# EAGLE board HealthMonitor (EAGLE 9.5.0)
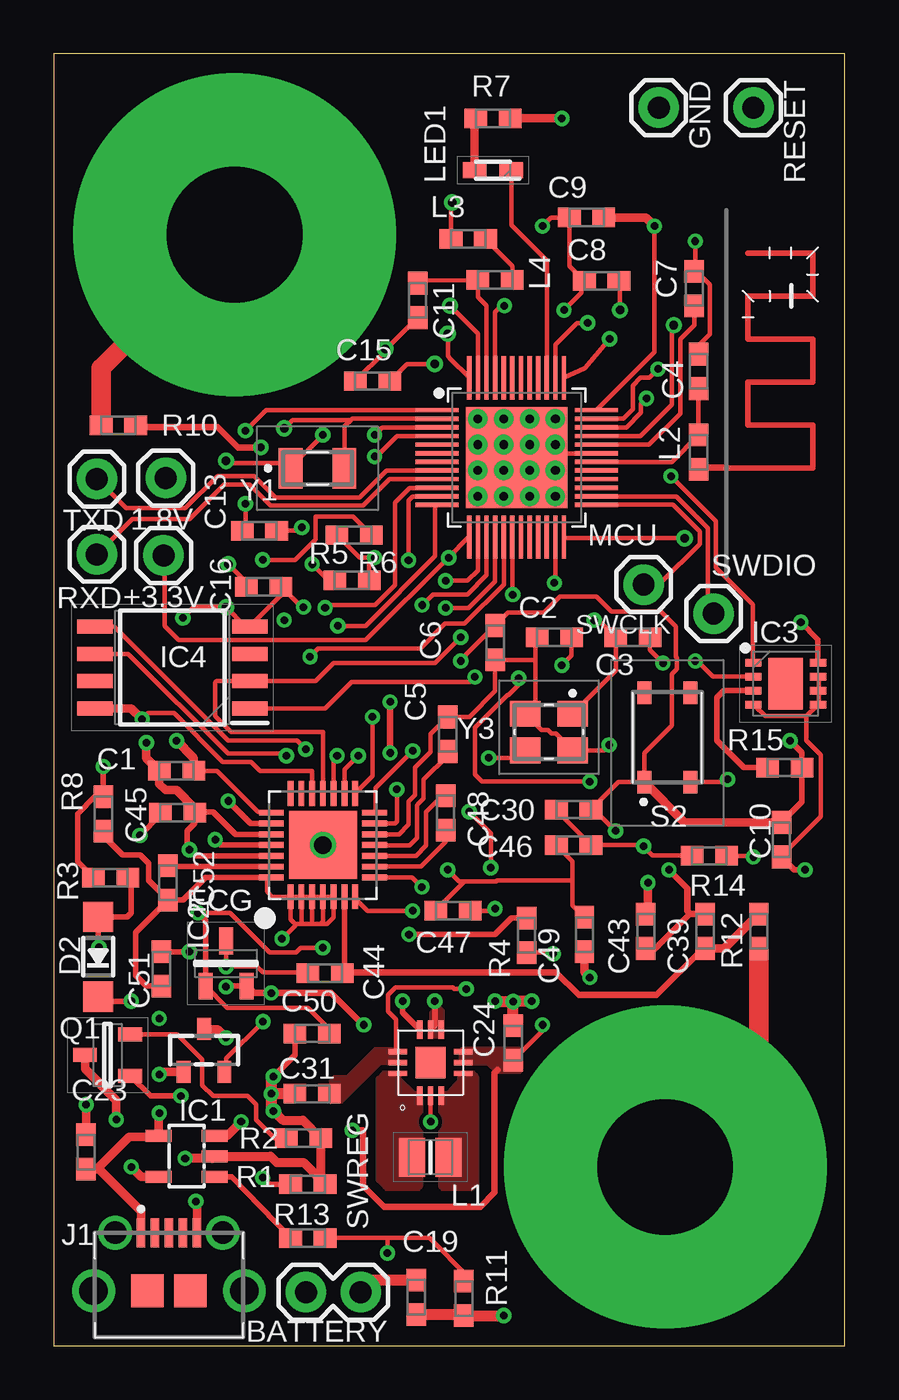
[diagram p0: board, top side]
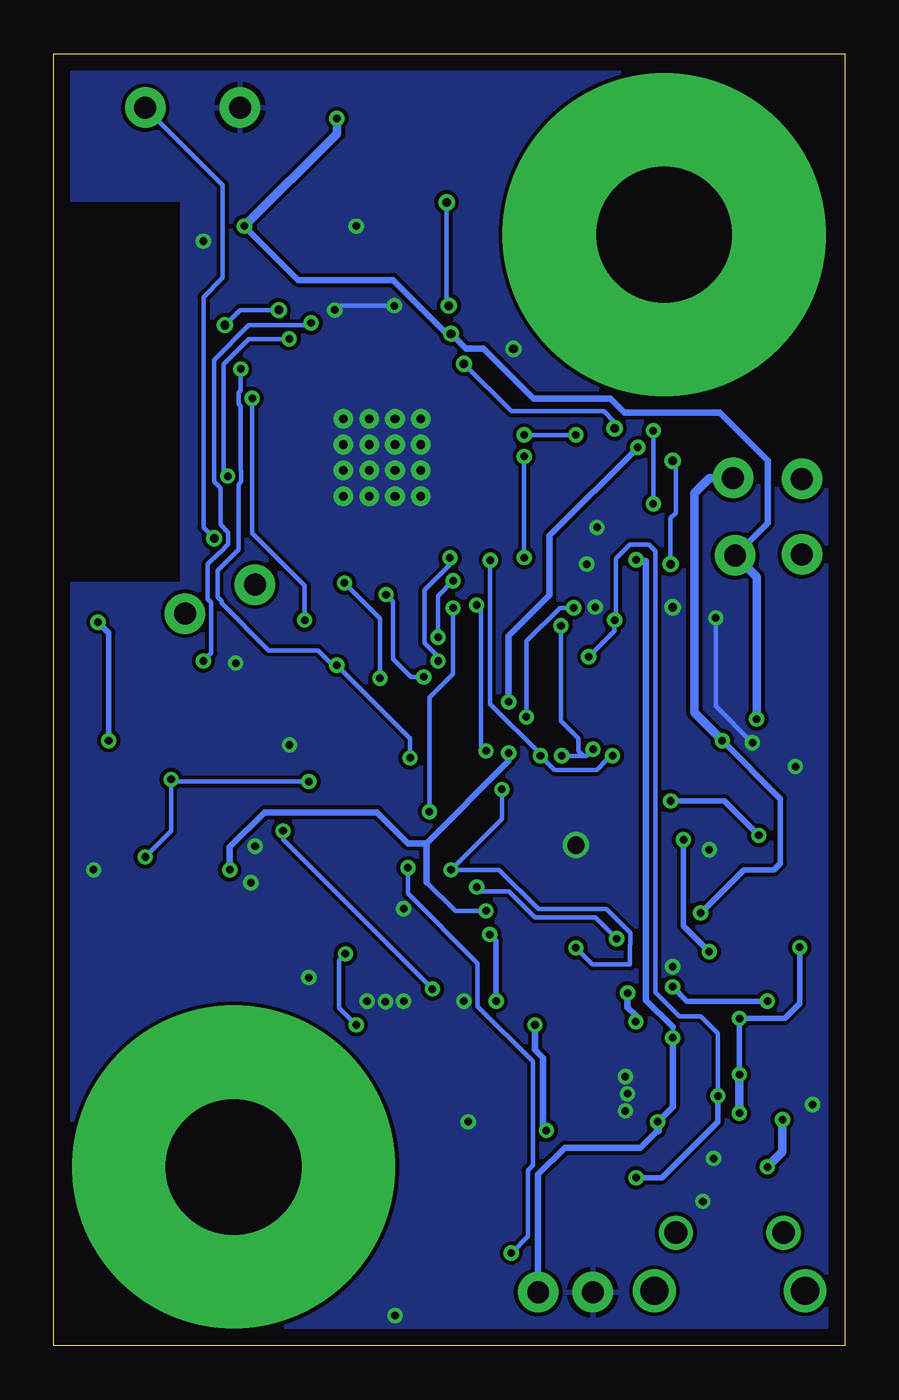
[diagram p1: board, bottom side, seen from below]

Size 36.75 x 60 mm. Coordinates in mm from the lower left corner, seen from the top.
Outline: 0,0 36.75,0 36.75,60 0,60 0,0
Copper layers (1*16): Top 0.035mm / dielectric 1.5mm / Bottom 0.035mm
Design rules "default *": minimum track width 7mil, minimum drill 0.35mm, track to track 7mil, track to pad 7mil, pad to pad 7mil, via to via 7mil, smd to smd 7mil, copper to edge 30mil, drill to drill 7mil, minimum pad ring 10mil, minimum via ring 7mil, stop-mask expansion 4mil, vias tented up to drill 0mil, thermal gap 10mil
Net classes: 1 power: width 0.178 mm
bRestrict: area 30.9,35.5 to 36.7,53.1

## Footprints (pad centres in the part's own frame; a part is rotated, then mirrored left to right if it is on the bottom)
1X01 = drill 1.016 pad 1.88: 1 0,0
1X02 = drill 1.016 pad 1.88: 1 0,0; 2 2.54,0
RESC0603_N = smd 1.05 x 0.9: 1 -0.8,0; 2 0.8,0
SOD-123 = smd 1.4 x 1.4: A 1.85,0; C -1.85,0
QFN-28 = smd 1.15 x 0.27: 1 -2.4,1.5; 2 -2.4,1; 3 -2.4,0.5; 4 -2.4,0; 5 -2.4,-0.5; 6 -2.4,-1; 7 -2.4,-1.5; 15 2.4,-1.5; 16 2.4,-1; 17 2.4,-0.5; 18 2.4,0; 19 2.4,0.5; 20 2.4,1; 21 2.4,1.5 | smd 0.27 x 1.15: 8 -1.5,-2.4; 9 -1,-2.4; 10 -0.5,-2.4; 11 0,-2.4; 12 0.5,-2.4; 13 1,-2.4; 14 1.5,-2.4; 22 1.5,2.4; 23 1,2.4; 24 0.5,2.4; 25 0,2.4; 26 -0.5,2.4; 27 -1,2.4; 28 -1.5,2.4 | smd 3.15 x 3.15: THERMAL 0,0
SOT23-5L = smd 0.55 x 1.2: 1 -0.95,-1.3; 2 0,-1.3; 3 0.95,-1.3; 4 0.95,1.3; 5 -0.95,1.3
SOT95P237X112-3N = smd 1.25 x 0.65: 1 -1.05,0.95; 2 -1.05,-0.95; 3 1.05,0
SON65P300X300X80-9N = smd 0.75 x 0.35: 1 -1.5,0.975; 2 -1.5,0.325; 3 -1.5,-0.325; 4 -1.5,-0.975; 5 1.5,-0.975; 6 1.5,-0.325; 7 1.5,0.325; 8 1.5,0.975 | smd 1.6 x 2.4: 9 0,0
SOIC127P790X216-8N = smd 1.65 x 0.65: 1 -3.6,1.905; 2 -3.6,0.635; 3 -3.6,-0.635; 4 -3.6,-1.905; 5 3.6,-1.905; 6 3.6,-0.635; 7 3.6,0.635; 8 3.6,1.905
101181940011LF = smd 0.4 x 1.35: 1 -1.3,1.825; 2 -0.65,1.825; 3 0,1.825; 4 0.65,1.825; 5 1.3,1.825 | drill 1.055 pad 1.582: 6 -2.5,1.825; 7 2.5,1.825 | drill 1.32 pad 1.98: 8 -3.5,-0.875; 9 3.5,-0.875 | smd 1.5 x 1.55: 10 -1,-0.875; 11 1,-0.875
INDC2016X100N = smd 1.2 x 1.8: 1 -0.85,0; 2 0.85,0
LEDM168X39N = smd 1.1 x 0.75: 1 -0.85,0; 2 0.85,0
QFN40P600X600X90-48_N = smd 2 x 0.2: 1 -3.7,2.2; 2 -3.7,1.8; 3 -3.7,1.4; 4 -3.7,1; 5 -3.7,0.6; 6 -3.7,0.2; 7 -3.7,-0.2; 8 -3.7,-0.6; 9 -3.7,-1; 10 -3.7,-1.4; 11 -3.7,-1.8; 12 -3.7,-2.2; 25 3.7,-2.2; 26 3.7,-1.8; 27 3.7,-1.4; 28 3.7,-1; 29 3.7,-0.6; 30 3.7,-0.2; 31 3.7,0.2; 32 3.7,0.6; 33 3.7,1; 34 3.7,1.4; 35 3.7,1.8; 36 3.7,2.2 | smd 0.2 x 2: 13 -2.2,-3.7; 14 -1.8,-3.7; 15 -1.4,-3.7; 16 -1,-3.7; 17 -0.6,-3.7; 18 -0.2,-3.7; 19 0.2,-3.7; 20 0.6,-3.7; 21 1,-3.7; 22 1.4,-3.7; 23 1.8,-3.7; 24 2.2,-3.7; 37 2.2,3.7; 38 1.8,3.7; 39 1.4,3.7; 40 1,3.7; 41 0.6,3.7; 42 0.2,3.7; 43 -0.2,3.7; 44 -0.6,3.7; 45 -1,3.7; 46 -1.4,3.7; 47 -1.8,3.7; 48 -2.2,3.7 | smd 4.7 x 4.7: PAD 0,0 | drill 0.4: PAD@VIA01 -1.8,1.8; PAD@VIA02 -1.8,0.6; PAD@VIA03 -1.8,-0.6; PAD@VIA04 -1.8,-1.8; PAD@VIA05 -0.6,1.8; PAD@VIA06 -0.6,0.6; PAD@VIA07 -0.6,-0.6; PAD@VIA08 -0.6,-1.8; PAD@VIA09 0.6,1.8; PAD@VIA10 0.6,0.6; PAD@VIA11 0.6,-0.6; PAD@VIA12 0.6,-1.8; PAD@VIA13 1.8,1.8; PAD@VIA14 1.8,0.6; PAD@VIA15 1.8,-0.6; PAD@VIA16 1.8,-1.8
SOT96P240X100-3N = smd 1.1 x 0.65: 1 -1.05,0.96; 2 -1.05,-0.96; 3 1.05,0
SOT23-R = smd 0.635 x 1.016: 1 -0.95,-1; 2 0.95,-1; 3 0,1
PTS810SJG250SMTRLFS = smd 1.05 x 0.65: 1 -2.075,1.075; 2 2.075,1.075; 3 -2.075,-1.075; 4 2.075,-1.075
TQFN-12 = smd 0.854 x 0.25: 1 -0.127,0; 2 -0.127,-0.5; 3 -0.127,-1; 7 2.927,-1; 8 2.927,-0.5; 9 2.927,0 | smd 0.25 x 0.854: 4 0.9,-2.027; 5 1.4,-2.027; 6 1.9,-2.027; 10 1.9,1.027; 11 1.4,1.027; 12 0.9,1.027 | smd 1.45 x 1.45: EPAD 1.4,-0.5
QWMP_MEANDERED_LEFT_+6 = smd 0.254 x 0.254: P$1 0,0
ABS0716632768KHZT = smd 1.1 x 1.9: 1 -1.25,0; 2 1.25,0
ABM8G16000MHZB4YT = smd 1.4 x 1.2: 1 -1.1,-0.85; 2 1.1,-0.85; 3 1.1,0.85; 4 -1.1,0.85

## Placement (x,y rotation side)
1.8V  [1X01]  5.2,40.3 180 top
+3.3V  [1X01]  5.1,36.7 180 top
BATTERY  [1X02]  14.25,2.48 180 top
C1  1uF  [RESC0603_N]  5.7,26.7 0 top
C2  12pF  [RESC0603_N]  23.25,32.9 180 top
C3  12pF  [RESC0603_N]  26.9,32.9 0 top
C4  0.8pF  [RESC0603_N]  29.95,45.25 90 top
C5  1nF  [RESC0603_N]  18.3,28.4 90 top
C6  100nF  [RESC0603_N]  20.5,32.65 270 top
C7  N.M.  [RESC0603_N]  29.75,49.1 90 top
C8  100pF  [RESC0603_N]  25.45,49.45 180 top
C9  100nF  [RESC0603_N]  24.75,52.4 180 top
C10  4.7µF  [RESC0603_N]  33.8,23.5 270 top
C11  1.0µF  [RESC0603_N]  16.9,48.55 270 top
C13  100nF  [RESC0603_N]  9.55,37.85 0 top
C15  12pF  [RESC0603_N]  14.8,44.8 0 top
C16  12pF  [RESC0603_N]  9.75,35.25 180 top
C19  10µF  [RESC0603_N]  16.84,2.25 270 top
C23  4.7µF  [RESC0603_N]  1.5,9 90 top
C24  10µF  [RESC0603_N]  21.34,14.06 90 top
C30  100nF  [RESC0603_N]  24.15,24.9 180 top
C31  22µF  [RESC0603_N]  12,11.7 180 top
C39  1nF  [RESC0603_N]  30.25,19.25 90 top
C43  10pF  [RESC0603_N]  27.5,19.25 90 top
C44  10pF  [RESC0603_N]  12.6,17.3 180 top
C45  10uF  [RESC0603_N]  5.75,24.75 0 top
C46  1uF  [RESC0603_N]  24.15,23.25 0 top
C47  10uF  [RESC0603_N]  18.55,20.2 0 top
C48  1uF  [RESC0603_N]  18.2,24.75 270 top
C49  1uF  [RESC0603_N]  24.65,19.1 270 top
C50  10uF  [RESC0603_N]  12,14.5 180 top
C51  10uF  [RESC0603_N]  5,17.5 270 top
C52  1uF  [RESC0603_N]  5.3,21.5 270 top
D2  MBR120  [SOD-123]  2.06,18.06 90 top
ECG  MAX30003CTI+  [QFN-28]  12.5,23.25 90 top
GND  [1X01]  28.1,57.5 270 top
IC1  MCP73831/OT  [SOT23-5L]  6.17,8.8 90 top
IC2  MCP1811AT-033_TT  [SOT95P237X112-3N]  8,17.75 90 top
IC3  MAX30205MTA+T  [SON65P300X300X80-9N]  34,30.75 0 top
IC4  AT25QF128A-SHB-T  [SOIC127P790X216-8N]  5.5,31.5 180 top
J1  10118194-0011LF  [101181940011LF]  5.35,3.42 0 top
L1  DFE201610R-H-1R0M=P2  [INDC2016X100N]  17.49,8.75 180 top
L2  3.9nH  [RESC0603_N]  29.95,41.5 270 top
L3  10µH  [RESC0603_N]  19.25,51.4 0 top
L4  15nH  [RESC0603_N]  20.5,49.5 180 top
LED1  IN-S63AT5G  [LEDM168X39N]  20.4,54.6 180 top
MCU  NRF52832  [QFN40P600X600X90-48_N]  21.5,41.25 0 top
Q1  2N7002K-7  [SOT96P240X100-3N]  2.5,13.5 180 top
Q3  DMG2305  [SOT23-R]  6.98,13.72 0 top
R1  10k  [RESC0603_N]  11.8,7.5 0 top
R2  10k  [RESC0603_N]  11.6,9.64 0 top
R3  100k  [RESC0603_N]  2.64,21.74 0 top
R4  100k  [RESC0603_N]  21.96,19.06 90 top
R5  100k  [RESC0603_N]  13.85,35.55 0 top
R6  100k  [RESC0603_N]  13.95,37.65 0 top
R7  60R  [RESC0603_N]  20.4,57 0 top
R8  0  [RESC0603_N]  2.3,24.7 270 top
R10  49.9k  [RESC0603_N]  3,42.75 0 top
R11  100k  [RESC0603_N]  19.05,2.2 90 top
R12  49.9K  [RESC0603_N]  32.75,19.25 90 top
R13  100k  [RESC0603_N]  11.8,5 0 top
R14  10k  [RESC0603_N]  30.45,22.75 180 top
R15  4.7k  [RESC0603_N]  33.95,26.85 0 top
RESET  [1X01]  32.5,57.5 270 top
RXD  [1X01]  2,36.75 180 top
S2  PTS810SJK250SMTRLFS  [PTS810SJG250SMTRLFS]  28.5,28.25 90 top
SWCLK  [1X01]  27.4,35.35 180 top
SWDIO  [1X01]  30.65,34 270 top
SWREG  SL9120IRVR  [TQFN-12]  17,11.75 90 top
TXD  [1X01]  2,40.25 180 top
U$5  ANTENNA_QUARTER-WAVE_MONOPOLE_MEANDERED_LEFT  [QWMP_MEANDERED_LEFT_+6]  31.25,40.75 0 top
Y1  ABS07-166-32.768KHZ-T  [ABS0716632768KHZT]  12.25,40.75 0 top
Y3  ABM8G-12.000MHZ-4Y-T3  [ABM8G16000MHZB4YT]  23,28.5 180 top

## Library data of the parts
1.8V +3.3V BATTERY GND RESET RXD SWCLK SWDIO TXD = SparkFun-Connectors
C1-C11 C13 C15 C16 C19 C23 C24 C30 C31 C39 C43-C52 L2-L4 = Nordic_nRF
D2 Q3 = microbuilder
ECG = circuitects
IC1 = adafruit
IC2 = SamacSys_Parts; DESCRIPTION: LDO Voltage Regulators Ultra Low Iq LDO; HEIGHT: 1.12mm; MANUFACTURER_NAME: Microchip; MANUFACTURER_PART_NUMBER: MCP1811AT-033/TT; MOUSER_PART_NUMBER: 579-MCP1811AT-033/TT; MOUSER_PRICE-STOCK: https://www.mouser.com/Search/Refine.aspx?Keyword=579-MCP1811AT-033%2FTT
IC3 = SamacSys_Parts; DESCRIPTION: Human Body Temperature Sensor, 8 TDFN-EP; HEIGHT: 0.8mm; MANUFACTURER_NAME: Maxim Integrated; MANUFACTURER_PART_NUMBER: MAX30205MTA+T; MOUSER_PART_NUMBER: 700-MAX30205MTA+T; MOUSER_PRICE-STOCK: https://www.mouser.com/Search/Refine.aspx?Keyword=700-MAX30205MTA%2BT
IC4 = SamacSys_Parts; DESCRIPTION: NOR Flash 128Mb, 133MHz, QPI,8-SOIC-W, IND TEMP, 2.7-3.6V, T&R; HEIGHT: 2.16mm; MANUFACTURER_NAME: Adesto Technologies; MANUFACTURER_PART_NUMBER: AT25QF128A-SHB-T; MOUSER_PART_NUMBER: 988-AT25QF128A-SHB-T; MOUSER_PRICE-STOCK: https://www.mouser.com/Search/Refine.aspx?Keyword=988-AT25QF128A-SHB-T
J1 = SamacSys_Parts; DESCRIPTION: Power to the Board MICRO USD B-TYPE; HEIGHT: 2mm; MANUFACTURER_NAME: Amphenol; MANUFACTURER_PART_NUMBER: 10118194-0011LF; MOUSER_PART_NUMBER: 649-10118194-0011LF; MOUSER_PRICE-STOCK: https://www.mouser.com/Search/Refine.aspx?Keyword=649-10118194-0011LF
L1 = SamacSys_Parts; DESCRIPTION: DFE201610R Series Inductor 1.0uH +/-20% 0806 (2016); HEIGHT: 1mm; MANUFACTURER_NAME: Murata Electronics; MANUFACTURER_PART_NUMBER: DFE201610R-H-1R0M=P2; MOUSER_PART_NUMBER: 81-DFE201610RH1R0MP2; MOUSER_PRICE-STOCK: https://www.mouser.com/Search/Refine.aspx?Keyword=81-DFE201610RH1R0MP2
LED1 = SamacSys_Parts; DESCRIPTION: Standard LEDs - SMD True Green LED; HEIGHT: 0.39mm; MANUFACTURER_NAME: Inolux; MANUFACTURER_PART_NUMBER: IN-S63AT5G; MOUSER_PART_NUMBER: 743-IN-S63AT5G; MOUSER_PRICE-STOCK: https://www.mouser.com/Search/Refine.aspx?Keyword=743-IN-S63AT5G
MCU = Nordic_nRFMAV
Q1 = SamacSys_Parts; ALLIED_NUMBER: 70437208; ALLIED_PRICE-STOCK: https://www.alliedelec.com/diodes-inc-2n7002k-7/70437208/; DESCRIPTION: N-CHANNEL ENHANCEMENT MODE MOSFET; HEIGHT: 1mm; MANUFACTURER_NAME: Diodes Inc.; MANUFACTURER_PART_NUMBER: 2N7002K-7; MOUSER_PART_NUMBER: 621-2N7002K-7; MOUSER_PRICE-STOCK: https://www.mouser.com/Search/Refine.aspx?Keyword=621-2N7002K-7; RS_PART_NUMBER: 7703383; RS_PRICE-STOCK: https://uk.rs-online.com/web/p/products/7703383
R1-R8 R10-R15 U$5 = Nordic_misc
S2 = SamacSys_Parts; DESCRIPTION: IP40 Black Button Tactile Switch, SPST-NO 50 mA 3mm Surface Mount; HEIGHT: mm; MANUFACTURER_NAME: C & K COMPONENTS; MANUFACTURER_PART_NUMBER: PTS810SJK250SMTRLFS; MOUSER_PART_NUMBER: 611-PTS810SJK250SMTR; MOUSER_PRICE-STOCK: https://www.mouser.com/Search/Refine.aspx?Keyword=611-PTS810SJK250SMTR; RS_PART_NUMBER: 1359396P; RS_PRICE-STOCK: http://uk.rs-online.com/web/p/products/1359396P
SWREG = MasumAhmed
Y1 = SamacSys_Parts; DESCRIPTION: Crystal IOT 32.786KHz XTAL 10ppm; HEIGHT: 0.9mm; MANUFACTURER_NAME: ABRACON; MANUFACTURER_PART_NUMBER: ABS07-166-32.768KHZ-T; MOUSER_PART_NUMBER: 815-ABS0716632.768KT; MOUSER_PRICE-STOCK: https://www.mouser.com/Search/Refine.aspx?Keyword=815-ABS0716632.768KT; RS_PART_NUMBER: 1753474P; RS_PRICE-STOCK: http://uk.rs-online.com/web/p/products/1753474P
Y3 = SamacSys_Parts; ALLIED_NUMBER: 71528098; ALLIED_PRICE-STOCK: https://www.alliedelec.com/abracon-abm8g-12-000mhz-4y-t3/71528098/; DESCRIPTION: Abracon 12MHz Crystal Unit +/-30ppm SMD 4-Pin 3.2 x 2.5 x 1mm; HEIGHT: 1mm; MANUFACTURER_NAME: ABRACON; MANUFACTURER_PART_NUMBER: ABM8G-12.000MHZ-4Y-T3; MOUSER_PART_NUMBER: 815-ABM8G-12-4YT3; MOUSER_PRICE-STOCK: https://www.mouser.com/Search/Refine.aspx?Keyword=815-ABM8G-12-4YT3; RS_PART_NUMBER: 1712832P; RS_PRICE-STOCK: http://uk.rs-online.com/web/p/products/1712832P

## Nets
3.3V [power]: +3.3V.1 C6.1 C9.1 C10.1 C30.1 C31.1 ECG.19 IC3.8 IC4.8 MCU.13 MCU.36 MCU.48 R7.2 R15.2 S2.1 SWREG.10 SWREG.11
+1.8V [power]: 1.8V.1 C1.2 C46.1 C47.1 C49.1 C50.1 ECG.13 ECG.22 IC2.1
AGND: C51.2 C52.2 ECG.1 ECG.2 ECG.3 ECG.4 ECG.5 ECG.8 ECG.28 R8.2
BATT_VOL: MCU.4 R5.2 R6.1
CH_ENABLE: MCU.17 Q1.1 R1.1
CHARGE_STAT: MCU.16 R11.2 R13.2
CSB: ECG.15 MCU.10
ECGN: R10.1
ECGN1: C39.2 C43.1 ECG.7 R10.2
ECGP: R12.1
ECGP1: C39.1 C44.1 ECG.6 R12.2
FCLK: ECG.14 MCU.15
GND [power]: BATTERY.2 C1.1 C2.2 C3.2 C4.2 C5.2 C6.2 C7.2 C8.2 C9.2 C10.2 C11.2 C13.2 C15.1 C16.1 C19.2 C23.2 C24.2 C30.2 C31.2 C43.2 C44.2 C45.2 C46.2 C47.2 C49.2 C50.2 ECG.12 ECG.24 ECG.26 ECG.THERMAL GND.1 IC1.2 IC2.3 IC3.4 IC3.5 IC3.6 IC3.7 IC4.4 J1.5 MCU.31 MCU.45 MCU.PAD MCU.PAD@VIA01 MCU.PAD@VIA02 MCU.PAD@VIA03 MCU.PAD@VIA04 MCU.PAD@VIA05 MCU.PAD@VIA06 MCU.PAD@VIA07 MCU.PAD@VIA08 MCU.PAD@VIA09 MCU.PAD@VIA10 MCU.PAD@VIA11 MCU.PAD@VIA12 MCU.PAD@VIA13 MCU.PAD@VIA14 MCU.PAD@VIA15 MCU.PAD@VIA16 R1.2 R2.2 R3.1 R5.1 R8.1 R11.1 R14.2 SWREG.2 SWREG.7 SWREG.8 Y3.2 Y3.4
LEDA: LED1.1 MCU.39
LX1 [power]: L1.1 SWREG.3 SWREG.4
LX2: L1.2 SWREG.1 SWREG.12
MISO: ECG.18 IC4.2 MCU.14
MOSI: ECG.17 IC4.5 MCU.12
N$1: R4.2 SWREG.9
N$2: IC1.1 R13.1
N$3: Q1.2 R2.1
N$4: C13.1 MCU.1
N$5: LED1.2 R7.1
N$7: IC1.5 Q1.3
N$9: C51.1 ECG.25
N$11: L3.2 L4.1
N$12: L3.1 MCU.47
N$13: C16.2 MCU.3 Y1.1
N$14: C3.1 MCU.34 Y3.1
N$15: C4.1 L2.1 MCU.30
N$16: L2.2 U$5.P$1
N$17: C5.1 ECG.11
N$18: C48.1 ECG.10
N$19: C45.1 ECG.23
N$20: C52.1 ECG.27
N$21: IC3.3 R15.1
N$22: C7.1 MCU.32
N$23: C48.2 ECG.9
N$24: C11.1 L4.2 MCU.46
N$25: C2.1 MCU.35 Y3.3
N$29: C8.1 MCU.33
RESET: MCU.24 RESET.1
RXD: MCU.9 RXD.1
SCL: IC3.2 MCU.38
SCLK: ECG.16 IC4.6 MCU.11
SDA: IC3.1 MCU.37
SF_CS: IC4.1 MCU.18
SWCLK: MCU.25 SWCLK.1
SWDIO: MCU.26 SWDIO.1
SWITCHA: MCU.23 R14.1 S2.3
TXD: MCU.8 TXD.1
V_BATT [power]: BATTERY.1 C19.1 IC1.3 Q3.3 R6.2
VBUS [power]: C23.1 D2.A IC1.4 J1.1 Q3.1 R3.2
VINBAT [power]: C24.1 D2.C IC2.2 Q3.2 R4.1 SWREG.5 SWREG.6
XL1: C15.2 MCU.2 Y1.2

## Tracks (layer width: path | path; a pad name or v marks a point on that pad's centre or on a via)
3.3V  (via drill 0.35, 0.35 pad 0.4, 0.4)
  Top 0.203: v27.9,52 27.9,46.15 MCU.36 | MCU.48 18.38,45.87 18.38,45.88 18.3,45.97 v18.3,47 | ECG.19 12,26.7 9.57,26.7 9.16,27.12 7.84,27.12 5.58,29.38 4.38,29.38 v4.1,29.1 | 12.86,11.34 C31.1 | 18.35,36.64 14.48,32.77 5.79,32.77 5.14,33.41 5.14,36.67 +3.3V.1 | 18.35,36.64 19.24,37.53 MCU.13 | v26.1,23.91 25.05,24.96 C30.1 26.23,26.18 S2.1 27.43,27.52 28.7,28.8 28.7,31.21 28.93,31.44 28.93,31.96 28.9,31.99 28.9,33.4 28.2,34.1 25.9,34.1 25.2,34.8 23.52,34.8 22.77,34.05 21.1,34.05 C6.1 18.9,31.85 v18.9,31.8 | SWREG.10 15.91,13.72 15.91,15.14 15.53,15.53 15.53,16.29 15.87,16.63 18.54,16.63 18.6,16.57 v19.16,16.57 | v18.35,36.59 18.35,36.64
  Top 0.254: C31.1 13,11.7 | v34.2,28.1 34.75,27.55 R15.2 34.75,25.25 C10.1 | v34.7,33.6 35.5,32.8 IC3.8
  Top 0.4: C10.1 29.3,24.3 S2.1 | v4.1,29.1 3.6,29.59 IC4.8 | v27.9,52 27.5,52.4 C9.1 | v23.6,57 R7.2
  Bottom 0.203: v26.1,23.91 26.1,23.51 v19.16,16.57 | v18.35,36.59 18.35,36.27 19.53,35.09 19.53,32.64 18.9,32.01 v18.9,31.8
  Bottom 0.254: v34.2,28.1 34.2,33.1 v34.7,33.6
  Bottom 0.305: v27.9,52 25.4,49.5 21,49.5 18.5,47 v18.3,47 17.61,46.31 16.79,46.31 14.46,43.99 10.89,43.99 10.24,43.34 5.81,43.34 3.59,41.11 3.59,38.21 +3.3V.1
  Bottom 0.4: v4.1,29.1 4.1,35.7 +3.3V.1 | v27.9,52 23.6,56.3 v23.6,57
  pour Top (no thermals): 16,13.1 16,13.8 14.9,13.8 13.6,12.5 13,12.5 12.8,12.3 12.8,11.3 13.4,11.3 15.2,13.1
+1.8V  (via drill 0.35)
  Top 0.203: IC2.1 8.05,15.7 11.8,15.7 12.8,14.7 C50.1 | C1.2 7.59,26.7 9.49,24.8 9.55,24.8 9.6,24.75 ECG.22 | C46.1 24.1,22.5 24.1,21.6 | C49.1 24.1,20.45 24.1,21.6 | C47.1 17.75,20.25 19.07,21.57 | 24.1,21.6 20.59,21.6 20.56,21.57 19.07,21.57 | 19.07,21.57 18.83,21.57 v18.3,22.1 | v12.5,18.48 11.47,18.48 11.26,18.27 10.03,18.27 8.2,20.1 v6.7,20.1 | v15.94,25.84 15.94,24.34 15.85,24.25 ECG.13
  Top 0.254: IC2.1 7.05,19.75 v6.7,20.1
  Top 0.4: v5.7,28.1 6.5,27.3 C1.2
  Bottom 0.203: v12.5,18.48 11.72,17.7 10,17.7 10,18.61 9.97,18.64 9.97,19.16 11.09,20.28 14.24,20.28 16.06,22.1 v18.3,22.1 15.94,24.46 v15.94,25.84
  Bottom 0.254: v6.7,20.1 4.7,22.1 3.3,22.1 3,22.4 3,25.4 v5.7,28.1
  Bottom 0.4: 1.8V.1 6.3,40.3 7,39.6 7,29.4 v5.7,28.1
AGND  (via drill 0.35)
  Top 0.203: ECG.2 ECG.3 | ECG.3 ECG.4 | ECG.4 ECG.5 13,19.9 12.7,19.6 12.4,19.6 | ECG.2 ECG.1 | ECG.1 10.15,20.85 9.9,21.1 9.9,21.75 | ECG.1 11,19.8 11.2,19.6 | 11.2,19.6 11.5,19.6 | 11.5,19.6 12,19.6 | 12,19.6 12.4,19.6 | ECG.4 12.5,19.7 12.4,19.6 | ECG.3 12,19.6 | ECG.2 11.5,19.6 | 11.2,19.6 11.2,19.5 v10.6,18.9 | v17.1,21.3 16.65,21.75 ECG.8
  Top 0.254: ECG.28 9.9,21.75 7.05,21.75 6,20.7 C52.2 | C51.2 4.3,16.7 3.8,17.2 3.8,19.2 C52.2 | C52.2 4.4,21.6 4.4,22.4 4,22.8 3.2,22.8 2.3,23.7 R8.2
  Bottom 0.203: v17.1,21.3 16.9,21.1 15.6,21.1 14.4,19.9 11.6,19.9 v10.6,18.9
BATT_VOL  (via drill 0.35)
  Top 0.203: MCU.4 15.95,42.25 15,41.3 v14.9,41.3 | R6.1 14.2,36.6 v14.9,36.6 14.65,36.35 R5.2
  Bottom 0.203: v14.9,41.3 v14.9,36.6
CH_ENABLE  (via drill 0.35)
  Top 0.203: MCU.17 20.9,35.36 19.07,33.53 18.18,33.53 17.04,32.38 12.29,32.38 v11.9,32
  Top 0.254: R1.1 10,7.5 v9.7,7.8 | v5.9,11.6 4.49,11.6 Q1.1
  Bottom 0.203: v5.9,11.6 5.9,14.5 6.7,15.3 7.7,15.3 8.8,16.4 8.8,36.9 9.1,37.2 10,37.2 10.63,36.57 10.63,33.77 v10.7,33.7 10.7,33.2 v11.9,32
  Bottom 0.254: v5.9,11.6 5.9,10.4 8.5,7.8 v9.7,7.8
CHARGE_STAT  (via drill 0.35)
  Top 0.203: R13.2 15.5,5 | 15.5,5 17.45,5 19.25,3.2 R11.2 | v19.3,24.8 20.3,23.8 v20.3,22.2 | v15.5,4.3 15.5,5 | MCU.16 20.5,35.5 19.26,34.26 v18.2,34.26
  Bottom 0.203: v19.3,24.8 19.3,30.1 18.2,31.2 v18.2,34.26 | v20.3,22.2 20.3,20.99 17.07,17.76 17.07,15.77 14.5,13.2 14.5,8.38 14.73,8.15 14.73,5.07 v15.5,4.3
CSB  (via drill 0.35)
  Top 0.203: ECG.15 14.8,26.45 v14.8,29.2 | v12.6,34.27 12.73,34.4 14.91,34.4 15.85,35.34 15.85,39.15 16.53,39.83 17.75,39.83 17.8,39.84 MCU.10
  Bottom 0.203: v12.6,34.27 13.25,34.27 14.8,32.72 v14.8,29.2
ECGN  (via drill 6.3 pad 15)
  Top 0.9: R10.1 2.2,45.4 v8.4,51.6
ECGN1  (via drill 0.35)
  Top 0.203: v16.67,20.19 14.57,20.19 14,20.77 ECG.7 | 3.81,42.67 R10.2
  Top 0.305: C43.1 27.95,18.45 29.55,20.05 | 29.55,20.05 C39.2 | 3.81,42.67 7.62,42.67 8.57,41.72 v9.62,41.72 | v15.62,27.53 v15.62,29.9 | v28.57,22.1 29.43,21.24 29.43,20.19 29.55,20.05
  Bottom 0.203: 19.43,21.53 18.1,20.19 v16.67,20.19
  Bottom 0.305: v9.62,41.72 13.72,37.62 13.72,34.86 15.62,32.96 v15.62,29.9 | v15.62,27.53 15.62,27.15 19.43,23.34 | 19.43,21.53 19.43,23.34 | v28.57,22.1 28.57,23.16 26.96,24.77 21.73,24.77 20.29,23.34 19.43,23.34
ECGP  (via drill 6.3 pad 15)
  Top 0.9: R12.1 32.75,13.65 28.4,9.3 v28.4,8.3
ECGP1
  Top 0.203: ECG.6 | 13.51,17.42 C44.1 13.53,17.34 | 30.1,18.38 C39.1
  Top 0.254: ECG.6 13.51,17.42
  Top 0.305: 13.53,17.34 23.34,17.34 24.38,16.29 28,16.29 30.1,18.38
  Top 0.4: C39.1 31.15,18.45 R12.2
FCLK  (via drill 0.35)
  Top 0.203: ECG.14 14.95,24.77 14.95,25.91 v16.67,27.63 | MCU.15 20.1,37.53 20.1,35.78 19.21,34.89 17.6,34.89 v17.11,34.4
  Bottom 0.203: v16.67,27.63 16.91,27.86 16.91,34.2 v17.11,34.4
GND  (via drill 0.35, 0.35 pad 0.4, 0.4, 0.8 pad 1)
  Top 0.203: v22.7,52 23.1,52.4 C9.2 23.95,50.15 C8.2 24.5,49.3 24.5,48.9 v23.7,48.1 | C7.2 29.8,49.95 | 29.8,49.95 v29.8,51.3 | v25.8,27.9 25.55,27.65 Y3.4 23.32,28.43 23.12,28.43 22.95,28.6 22.65,28.6 Y3.2 21.91,29.43 22.38,29.91 22.38,31.9 | v28.3,31.7 27.7,32.3 C3.2 | SWREG.2 v17.5,10.4 | IC2.3 v8,17.6 8.1,17.62 9.43,17.62 9.72,17.34 11.72,17.34 C44.2 | C15.1 15.4,46.2 v15.4,46.3 15.45,46.3 C11.2 | C30.2 23.35,24.85 C46.2 27.35,23.25 v27.4,23.2 27.43,23.15 27.81,22.77 29.62,22.77 R14.2 | IC3.7 35.53,31.05 35.53,30.48 IC3.6 35.53,30.39 35.53,29.81 IC3.5 35.43,29.72 34.96,29.24 | 34.96,29.24 33.05,29.24 32.58,29.72 IC3.4 | 22.38,31.9 22.38,32.86 C2.2 | MCU.31 25.15,41.43 23.72,41.43 23.34,41.81 MCU.PAD@VIA14 | 34.96,29.24 34.96,28.1 35.62,27.43 35.62,24.57 33.91,22.86 C10.2 | MCU.PAD 21.43,41.34 20.95,41.81 MCU.PAD@VIA06 | 22.38,31.9 22.33,31.85 C6.2 20.5,30.4 19.3,29.2 C5.2 17.5,28.41 17.5,27.57 16.79,26.85 16.79,25.57 16.49,25.27 16.49,24.2 16.04,23.75 ECG.12 | v11.6,34.3 11.5,34.3 C16.1 10.55,34.85 IC4.4 8.89,33.41 v8,34.3 6.5,34.3 v6,33.8 | R5.1 12.75,35.55 v12,36.3 | v11.52,38 11.37,37.85 C13.2 | MCU.45 20.5,48 20.8,48.3 v20.93,48.3 | IC1.2 7.37,8.7 | C4.2 29.95,46.45 30.48,46.98 30.48,49.27 29.8,49.95 | v20.5,20.3 20.4,20.2 C47.2
  Top 0.254: SWREG.8 17.7,14.88 v17.7,16 | C50.2 11.2,13.5 v10.2,12.5 | ECG.26 6.58,22.75 v6.3,23.03 6.2,23.13 6.2,23.9 6.55,24.25 C45.2 6.6,24.8 7.4,24.8 8.45,23.75 ECG.24 | v2.3,26.9 R8.1 1.9,25.5 1.1,24.7 1.1,22.48 R3.1 | C10.2 34.4,22.1 v34.9,22.1
  Top 0.4: C23.2 v1.5,11.2 | J1.5 6.65,6.65 v6.6,6.7 | v4.3,28 4.3,27.3 C1.1 4.9,26.1 5.2,25.8 5.7,25.8 6.55,24.95 C45.2 | C43.2 27.6,20.15 v27.6,21.5 | C49.2 24.65,17.35 v24.9,17.1
  Top 0.406: 7.37,8.7 v6.1,8.7 | IC1.2 10.07,8.8 10.36,8.51 11.59,8.51 R1.2 12.4,7.7 R2.2 11.57,10.47 10.63,10.47 v10.2,10.9
  Top 0.5: C31.2 v10.1,11.7 | v10.1,11.7 10.1,11 v10.2,10.9 | C24.2 v21.34,15.97 | v21.34,15.97 21.37,16 v22.2,16 | v21.34,15.97 20.52,15.97 v20.5,16 | v10.2,12.5 10.1,12.4 v10.1,11.7 | C19.2 19,1.45 R11.1 v20.9,1.4
  Bottom 0.203: v4.3,28 6,29.7 v6,33.8 | v20.93,48.3 23.5,48.3 v23.7,48.1
  other vias: 12.5,23.25
  pour Bottom: 0,60 0,0 36.75,0 36.75,60
  pour Top (no thermals): 17.5,15.5 17.85,15.85 18.1,15.6 18.1,14.3 17.5,14.3
LEDA
  Top 0.203: MCU.39 22.9,50.4 21.25,52.05 LED1.1
LX1
  pour Top (no thermals): 18.95,12.65 19.45,12.65 19.6,12.5 19.6,7.5 19.4,7.3 18.1,7.3 18,7.4 18,11.7 18.3,11.7 18.6,12 18.9,12.3 18.9,12.6 18.95,12.65
LX2
  pour Top (no thermals): 17,11.7 17,7.4 16.9,7.3 15.5,7.3 15.4,7.4 15.1,7.7 15.1,12.3 15.1,12.4 15.35,12.65 15.98,12.65 16,12.63 16,12.4 16.7,11.7
MISO  (via drill 0.35)
  Top 0.203: ECG.18 12.5,28.5 8.24,28.5 7.5,29.24 7.5,30.8 7.57,30.86 IC4.2 12.16,30.86 13,31.7 17.7,31.7 v18.9,32.9 | MCU.14 19.7,36 19.23,35.53 v18.2,35.53
  Bottom 0.203: v18.9,32.9 18.9,34.83 v18.2,35.53
MOSI  (via drill 0.35)
  Top 0.203: ECG.17 13,27.24 v13.16,27.4 | v11.7,27.7 11.3,28.1 8.1,28.1 2.79,33.41 IC4.5 | v13.19,33.43 14.48,33.43 17.72,36.67 17.72,38.96 MCU.12
  Bottom 0.203: v13.16,27.4 12.19,27.4 | 12.19,27.4 12,27.4 v11.7,27.7 | v13.19,33.43 13.19,29 12.38,28.19 12.38,27.62 12.19,27.43 12.19,27.4
N$1  (via drill 0.35)
  Top 0.254: SWREG.9 16.2,15.48 v16.2,16 | R4.2 21.26,19.86 20.5,19.1 v16.5,19.1
  Bottom 0.254: v16.2,16 16.2,18.8 v16.5,19.1
N$2
  Top 0.254: IC1.1 8.25,7.85 R13.1
N$3
  Top 0.203: R2.1 10.26,9.64 9.4,10.5 9.4,11.2 9,11.6 7.4,11.6 6.9,12.1 6.9,13.3 5.74,14.46 Q1.2
N$4  (via drill 0.35)
  Top 0.203: MCU.1 9.85,43.45 v8.9,42.5 | v8.9,39.1 8.9,38 C13.1
  Bottom 0.203: v8.9,42.5 v8.9,39.1
N$5
  Top 0.4: LED1.2 19.55,56.95 R7.1
N$7  (via drill 0.35)
  Top 0.4: IC1.5 4.05,7.85 v3.6,8.3 | v2.9,10.5 2.9,11.4 1.45,12.85 Q1.3
  Bottom 0.4: v3.6,8.3 2.9,9 v2.9,10.5
N$9  (via drill 0.35)
  Top 0.254: ECG.25 7.75,23.25 v7.5,23.5 | v6.3,18.3 C51.1
  Bottom 0.254: v7.5,23.5 7.5,19.5 v6.3,18.3
N$11
  Top 0.203: L4.1 21.3,50.15 L3.2
N$12  (via drill 0.4)
  Top 0.203: L3.1 18.45,53.05 v18.5,53.1 | v18.4,48.3 19.7,47 MCU.47
  Bottom 0.203: v18.5,53.1 18.5,48.4 v18.4,48.3
N$13  (via drill 0.35, 0.4)
  Top 0.203: MCU.3 15.25,42.65 v14.9,42.3 | v12.5,42.3 11,40.8 | 11,40.8 Y1.1 | C16.2 8.95,35.45 v8.1,36.3 | v8,41.1 8.1,41 10.8,41 11,40.8
  Bottom 0.203: v14.9,42.3 v12.5,42.3 | v8.1,36.3 8.1,38.43 7.86,38.67 7.86,40.96 v8,41.1
N$14  (via drill 0.35)
  Top 0.203: Y3.1 26.1,31.35 C3.1 25.3,33.7 v25.1,33.7 | v27.53,44 27.28,43.75 27.28,43.34 26.59,42.65 MCU.34
  Bottom 0.203: v27.53,44 27.53,37.73 25.1,35.3 v25.1,33.7
N$15
  Top 0.203: MCU.30 28.7,41.05 L2.1 C4.1
N$16
  Top 0.203: U$5.P$1 31.22,40.78 | L2.2 30.03,40.78
  Top 0.305: 31.22,40.78 30.03,40.78
N$17
  Top 0.203: ECG.11 14.95,23.24 16.53,23.24 16.87,23.58 16.87,25.1 16.92,25.15 16.92,25.16 17.17,25.41 17.17,26.29 18.3,27.42 C5.1
N$18
  Top 0.203: ECG.10 16.82,22.75 17.3,23.23 17.3,24.8 18,25.5 18,25.55 C48.1
N$19  (via drill 0.35)
  Top 0.254: ECG.23 9.15,24.25 v8.1,25.3 | C45.1 4.95,24.65 v4,23.7
  Bottom 0.254: v8.1,25.3 5.6,25.3 v4,23.7
N$20
  Top 0.254: ECG.27 5.35,22.25 C52.1
N$21
  Top 0.254: R15.1 32.05,26.85 30.8,28.1 30.8,30.1 31.12,30.43 IC3.3
N$22
  Top 0.203: C7.1 29.75,47.4 29.1,46.75 29.1,43.3 27.65,41.85 MCU.32
N$23
  Top 0.203: ECG.9 17.05,22.25 18.2,23.39 C48.2
N$24
  Top 0.178: C11.1 17.05,49.5 L4.2
  Top 0.203: L4.2 19.7,48.7 20.1,48.3 MCU.46
N$25  (via drill 0.35)
  Top 0.203: C2.1 24.05,32.05 v23.6,31.6 | v20.2,27.3 21.55,27.3 Y3.3 | MCU.35 26.45,43.05 26.9,43.5 26.9,44.6 27.26,44.96 27.66,44.96 v28.07,45.36
  Bottom 0.203: v20.2,27.3 20.2,28.2 v23.6,31.6 23.62,31.62 23.81,31.62 24.48,32.29 26.77,32.29 28.96,34.48 28.96,34.58 29.15,34.77 29.15,36.01 28.16,36.99 28.16,40 28.04,40.12 28.04,40.65 28.07,40.67 28.07,43.64 28.16,43.74 28.16,44.26 28.07,44.36 v28.07,45.36
N$29  (via drill 0.4)
  Top 0.203: C8.1 26.3,49.4 v26.3,48.1 | v28.8,47.4 28.7,47.3 28.7,43.7 27.25,42.25 MCU.33
  Bottom 0.203: v26.3,48.1 28.1,48.1 v28.8,47.4
RESET  (via drill 0.4)
  Top 0.203: v29.3,37.5 23.75,37.5 MCU.24
  Bottom 0.203: RESET.1 28.9,53.9 28.9,49.6 29.8,48.7 29.8,38 v29.3,37.5
RXD
  Top 0.203: MCU.9 15.59,40.25 14.36,39.02 10.08,39.02 9.1,40 7.9,40 6.3,38.4 3.65,38.4 RXD.1
SCL  (via drill 0.35)
  Top 0.203: IC3.2 30.62,31.07 29.9,31.8 v29.8,31.8 | v24.8,47.5 24.3,47.5 23.3,46.5 23.3,44.97 MCU.38
  Bottom 0.203: v29.8,31.8 29.43,32.17 29.43,34.51 29.6,34.67 29.6,36.3 29.06,36.84 29.03,36.84 28.64,37.23 28.64,37.77 29,38.13 29,39.82 29.3,40.12 29.3,45.78 27.69,47.39 24.91,47.39 v24.8,47.5
SCLK  (via drill 0.35)
  Top 0.203: ECG.16 13.5,26.76 v14.14,27.4 | v10.8,27.4 10.7,27.5 8.1,27.5 3.46,32.13 IC4.6 | v16.48,36.48 16.48,39.24 16.67,39.43 17.72,39.43 MCU.11
  Bottom 0.203: v10.8,27.4 11,27.2 11.07,27.2 11.53,26.74 13.49,26.74 v14.14,27.4 14.1,27.43 16.48,29.81 v16.48,36.48
SDA  (via drill 0.35)
  Top 0.203: v25.82,46.76 24.67,45.4 MCU.37 | IC3.1 32.48,31.81 32.48,34.42 30.77,36.13 30.77,38.29 v28.67,40.39
  Bottom 0.203: v28.67,40.39 28.87,40.59 28.87,45.6 27.71,46.76 v25.82,46.76
SF_CS  (via drill 0.35)
  Top 0.203: MCU.18 21.32,37.53 v21.32,34.88 | v19.56,31.06 19.33,30.83 13.83,30.83 12.6,29.59 IC4.1
  Bottom 0.203: v21.32,34.88 21,34.57 21,31.9 20.16,31.06 v19.56,31.06
SWCLK
  Top 0.203: MCU.25 28.76,39.06 30,37.81 30,37.24 28.19,35.43 27.43,35.43 SWCLK.1
SWDIO
  Top 0.203: MCU.26 25.21,39.44 28.92,39.44 30.39,37.97 30.39,34.27 SWDIO.1
SWITCHA  (via drill 0.35)
  Top 0.203: R14.1 32.35,22.75 32.4,22.8 v32.5,22.7 | v31.3,26.3 31.18,26.18 S2.3 | v24.9,26.2 19.9,26.2 19.57,26.53 19.57,28.71 21.08,30.23 21.13,30.23 21.6,30.7 v21.6,31 | MCU.23 23.3,35.48 v23.25,35.42
  Bottom 0.203: v32.5,22.7 31.3,23.9 v31.3,26.3 31.2,26.2 v24.9,26.2 | v21.6,31 21.6,33.77 v23.25,35.42
TXD
  Top 0.203: MCU.8 15.45,40.65 14.2,39.4 10.3,39.4 9.3,40.4 7.6,40.4 6.1,38.9 3.35,38.9 TXD.1
V_BATT  (via drill 0.35, 0.35 pad 0.4)
  Top 0.203: R6.2 13.9,38.5 12.15,38.5 12.15,37.45 11.2,36.5 v9.7,36.5
  Top 0.254: IC1.3 8.05,9.75
  Top 0.4: 8.05,9.75 v8.7,10.4 | v8,14.3 7.6,14.7 7,14.7 Q3.3
  Top 0.5: BATTERY.1 14.82,3.05 C19.1
  Bottom 0.203: v8,14.3 8,14.8 | 9.24,36.44 9.3,36.5 v9.7,36.5
  Bottom 0.305: v8,14.3 8,11.1 v8.7,10.4 | BATTERY.1 14.25,7.95 13,9.2 9.5,9.2 8.7,10 | 9.24,36.44 9.24,16.04 8,14.8
  Bottom 0.4: 8.7,10 v8.7,10.4
VBUS  (via drill 0.35)
  Top 0.254: 4.87,10.77 v4.9,10.8 | v4.9,12.6 5.02,12.72 | R3.2 3.6,21.58 3.6,20.1 3.41,19.91 D2.A 2.06,18.54 v2.1,18.5
  Top 0.4: 2,8.2 C23.1 | 2,8.2 3.5,9.7 4.82,9.7 IC1.4 4.87,10.77 | J1.1 4.05,6.25 2.1,8.2 2,8.2 | 5.02,12.72 Q3.1
  Bottom 0.254: v4.9,12.6 v4.9,15.2 2.8,15.2 2.1,15.9 v2.1,18.5
  Bottom 0.4: v4.9,10.8 v4.9,12.6
VINBAT  (via drill 0.35)
  Top 0.203: v22.7,14.9 22.7,14.62 C24.1 | R4.1 23.14,18.26 v23.2,18.2 | v9.72,15.05 8,13.34 8,12.76 Q3.2 | 9.05,16.67 IC2.2
  Top 0.254: D2.C 2.27,16 v3.6,16 | v8,16.67 8.03,16.7 IC2.2
  Top 0.305: 9.05,16.67 9.34,16.38 v10.1,16.38 12.89,16.38 14.37,14.9 v14.4,14.9 | 20.6,12.8 20.48,12.67 20.48,7.12 19.82,6.46 15.34,6.46 14.37,7.42 14.37,10 v13.87,10
  Bottom 0.203: v23.2,18.2 23.5,17.9 23.5,15.7 v22.7,14.9 | 14.02,10.15 v13.87,10
  Bottom 0.254: v3.6,16 7.33,16 v8,16.67
  Bottom 0.305: v9.72,15.05 9.72,15.34 10.1,15.72 v10.1,16.38 | v14.4,14.9 14.4,13.74 14.02,13.36 14.02,10.15
  pour Top (no thermals): 19,13.2 19,13.7 21.6,13.7 21.6,12.8 20.6,12.8 20.2,13.2
XL1  (via drill 0.4)
  Top 0.203: MCU.2 13.85,43.05 13.8,43 | 13.8,43 13.5,42.7 Y1.2 | C15.2 16.4,45.6 v17.7,45.6 | v10.7,42.6 11.1,43 13.8,43
  Bottom 0.203: v17.7,45.6 15.5,43.4 11.2,43.4 10.7,42.9 v10.7,42.6

## Text on the board
silk_bottom: Designed By M Ahmed / Wearable ECG Monitor / Version 1.00